# Altium PCB PCB1.PcbDoc
Units mm, origin at the board's own origin, x right, y up, seen from the top; angles counter-clockwise.
Board outline 50 x 57.78 mm, 2 copper layers (Top Layer, Bottom Layer); 37 components, 43 nets, 153 pads, 40 vias.
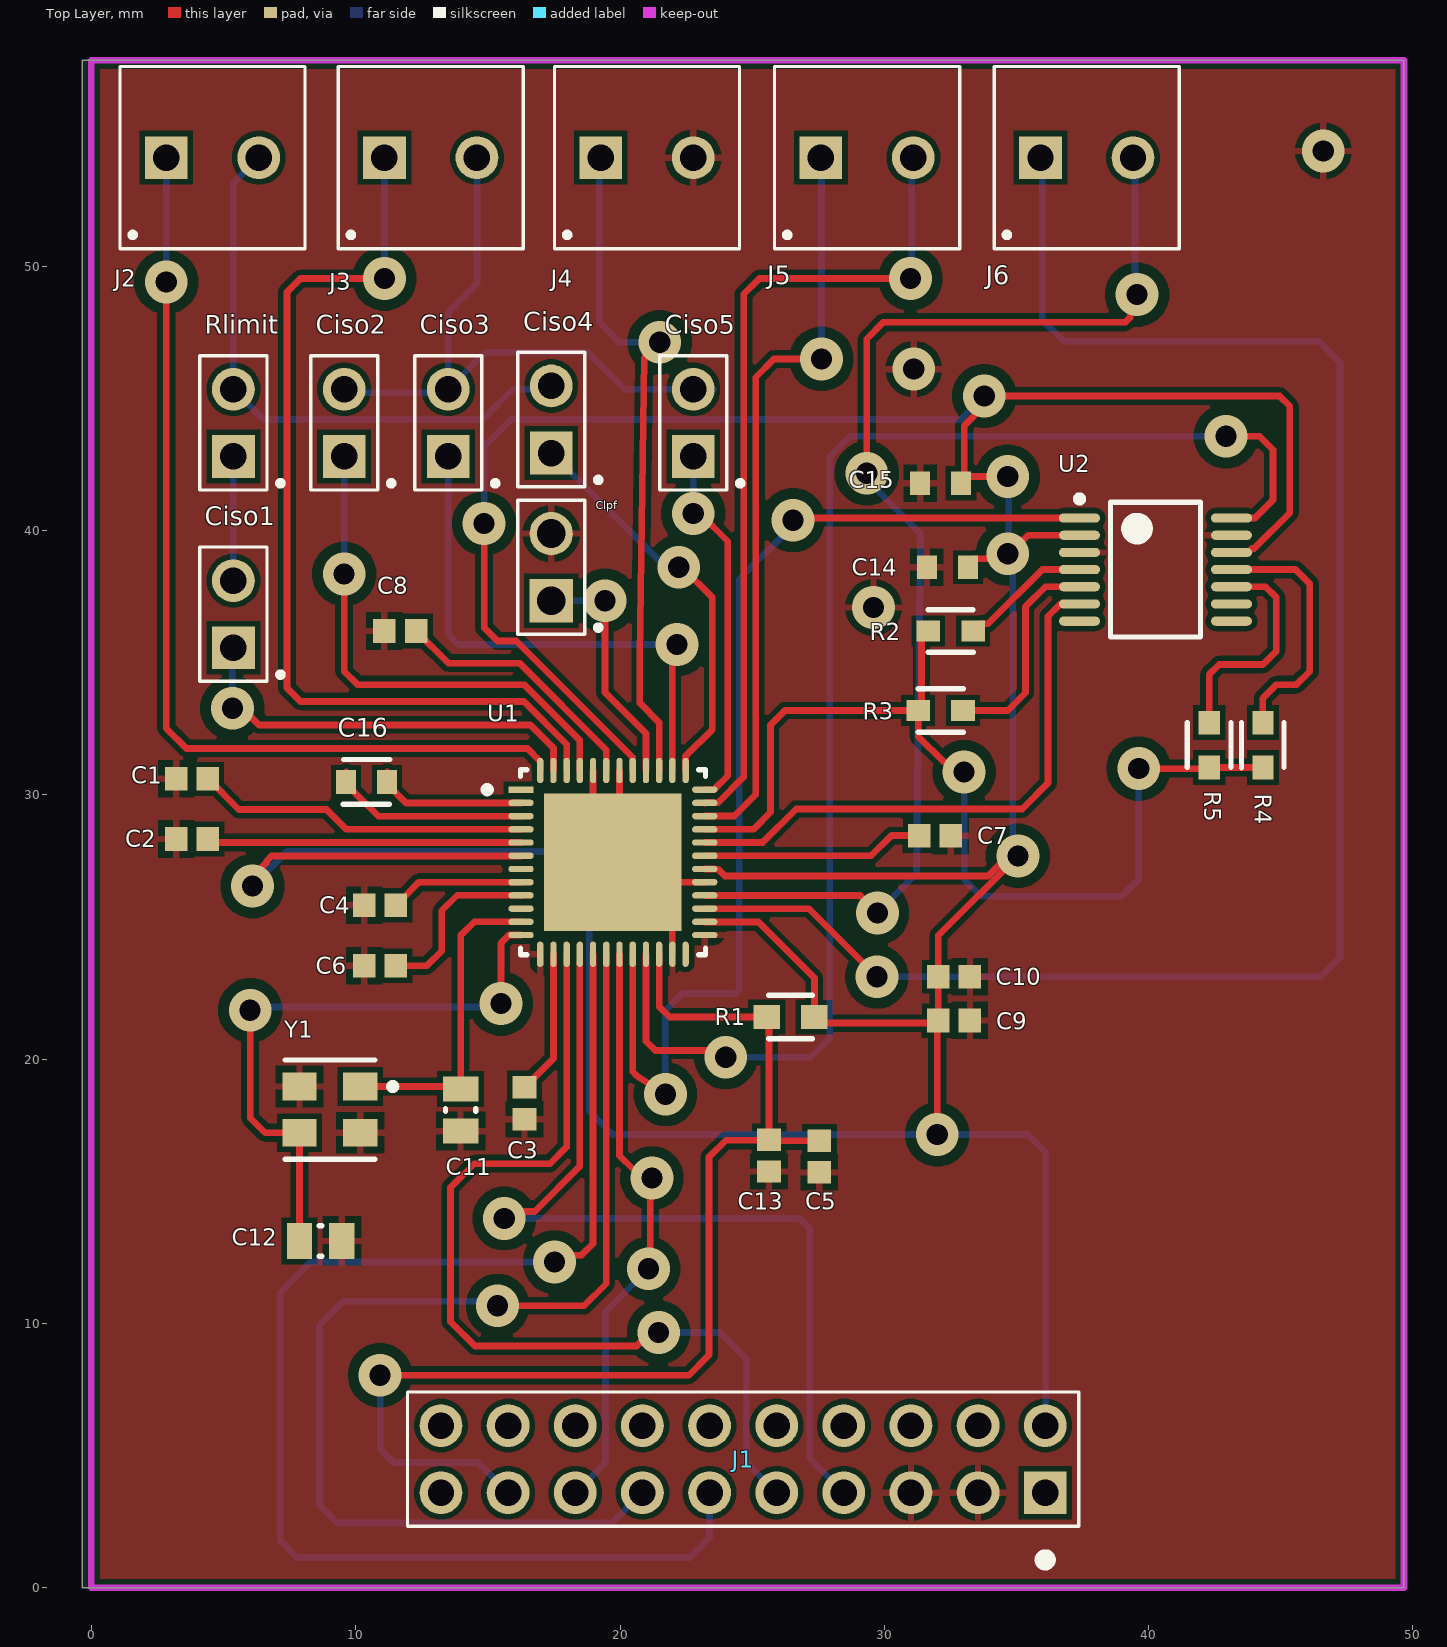
[diagram p0: Top Layer view]
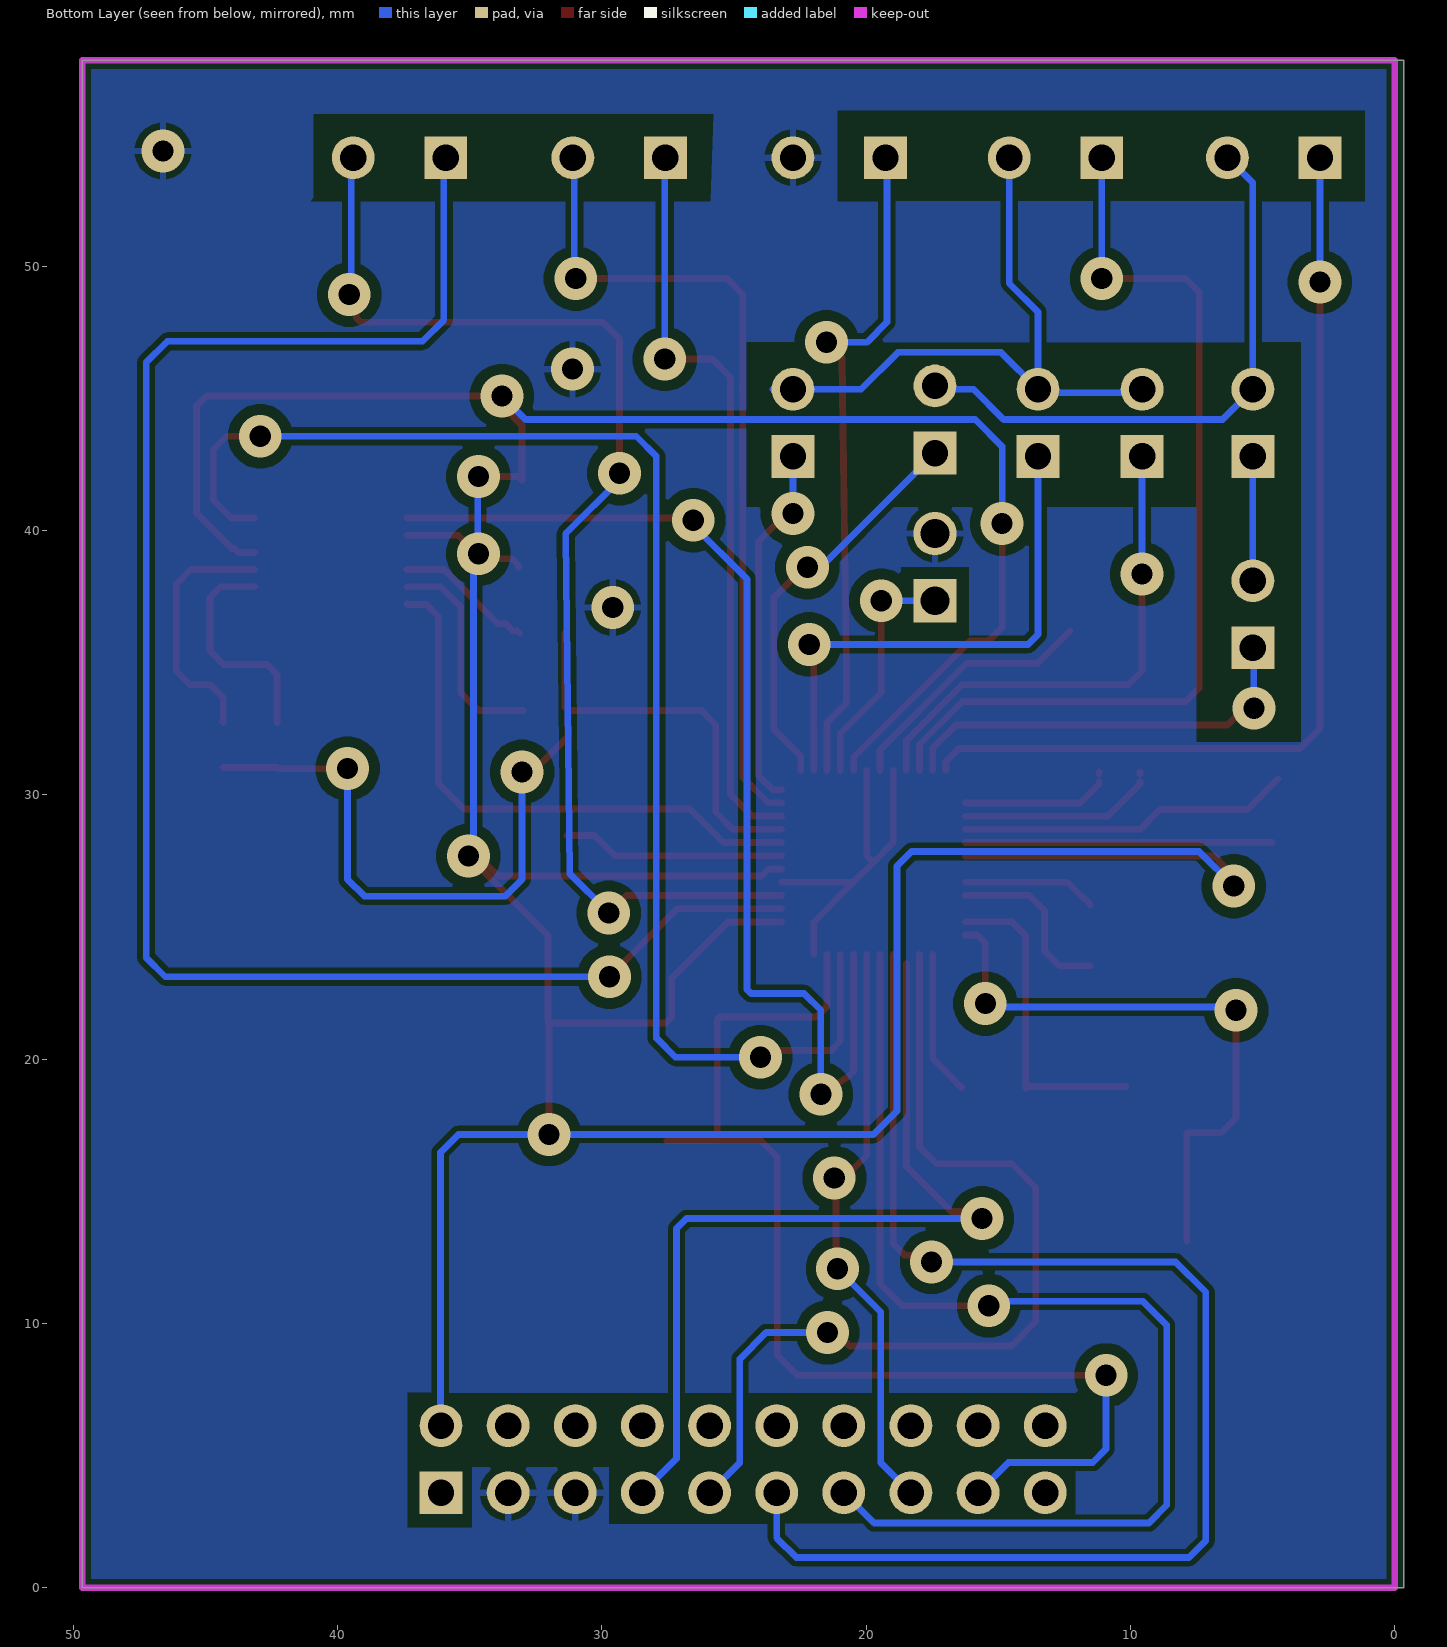
[diagram p1: Bottom Layer view, seen from below]
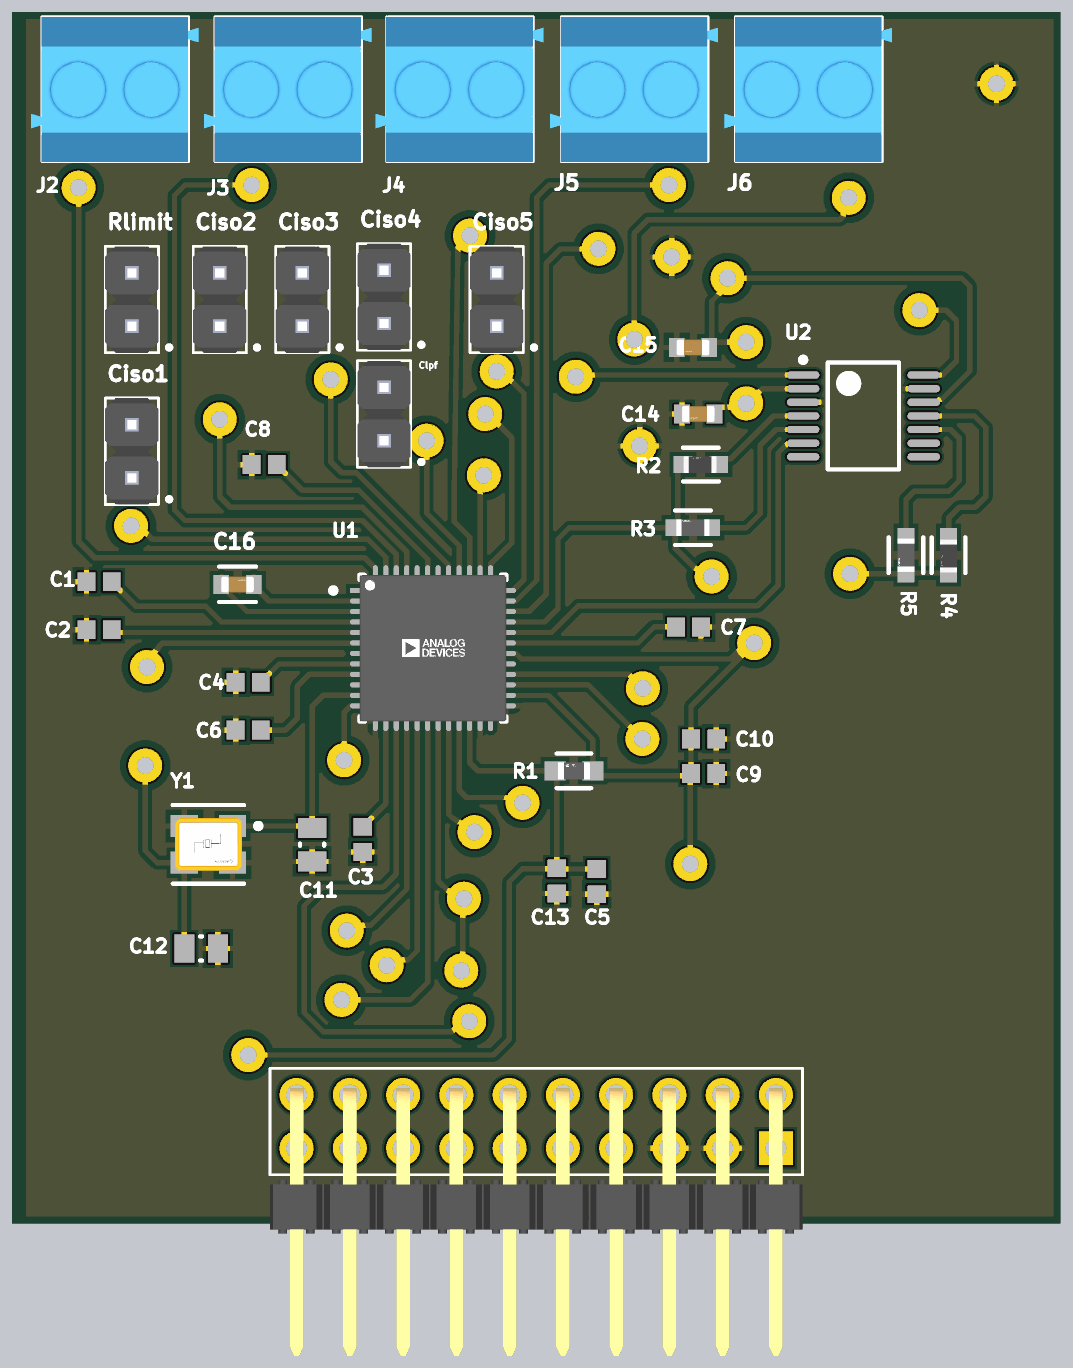
[diagram p2: 3D render of the assembled board from above, using the file's embedded part models]

## Layer stack, top to bottom
Top Solder: solder mask 0.0102, Solder Resist, Dk 3.5
Top Layer: signal copper 0.0356
Dielectric 1: dielectric 0.32, FR-4, Dk 4.8
Bottom Layer: signal copper 0.0356
Bottom Solder: solder mask 0.0102, Solder Resist, Dk 3.5

## Board outline
-0.342,0 -0.342,57.785 49.658,57.785 49.658,0

## Design rules (kind name [scope] priority, off if disabled: settings)
Clearance Clearance_1 [IsVia] p1: gap=0.4 ignorepadtopadclearanceinfootprint=FALSE
Clearance [All] p2: gap=0.2 ignorepadtopadclearanceinfootprint=FALSE
MinimumSolderMaskSliver [All] p1: minsoldermaskwidth=0
PolygonConnect [All] p1: connectstyle=Relief reliefconductorwidth=0.254 reliefentries=4 polygonreliefangle="90 Angle" airgapwidth=0.254
RoutingVias [All] p1: holewidth=0.711 width=1.27 viastyle="Through Hole" minholewidth=0.711 minwidth=1.27 maxholewidth=0.711 maxwidth=1.27
SilkToSolderMaskClearance [IsPad] p1: minsilkscreentomaskgap=0 clearancetoexposedcopper=TRUE
SolderMaskExpansion [All] p1: expansion=0.102 istentingtop=FALSE
Width [All] p1: maxlimit=0.254 minlimit=0.254 preferedwidth=0.254
28 further rules are at their usual default settings.

## Classes and differential pairs
component class Sheet4: C1 C2 C3 C4 C5 C6 C7 C8 C9 C10 C11 C12 C13 R1 Y1
component class Sheet3: C14 C15 R2 R3 R4 R5 U2
component class Sheet2: C16 Ciso1 Ciso2 Ciso3 Ciso4 Ciso5 Clpf J1 J2 J3 J4 J5 J6 Rlimit U1

## Components (designator, comment, footprint, x,y, rotation, side; value= is the part's Value field where it differs from the comment)
C1 "470nF" CAPC1608X95X40LL15T15 3.81,30.607 r0 top
C2 "470nF" CAPC1608X95X40LL15T15 3.81,28.321 r0 top
C3 "470nF" CAPC1608X95X40LL15T15 16.383,18.325 r90 top
C4 "100nF" CAPC1608X95X40LL15T15 10.922,25.818 r0 top
C5 "100nF" CAPC1608X95X40LL15T15 27.541,16.31 r90 top
C6 "100nF" CAPC1608X95X40LL15T15 10.922,23.532 r0 top
C7 "470nF" CAPC1608X95X40LL15T15 31.916,28.448 r180 top
C8 "4.7uF" CAPC1608X95X40LL15T15 11.684,36.195 r0 top
C9 "10uF" CAPC1608X95X40LL15T15 32.639,21.463 r180 top
C10 "100nF" CAPC1608X95X40LL15T15 32.639,23.114 r180 top
C11 "12pF" CAPC0805(2012)100_L 13.97,18.071 r270 top
C12 "12pF" CAPC0805(2012)100_L 8.674,13.118 r0 top
C13 "10uF" CAPC1608X95X40LL15T15 25.636,16.345 r90 top
C14 "100nF" FP-GRM18-0_15-MFG#1 32.385,38.608 r180 top value=10uF
C15 "10uF" FP-GRM18-0_15-MFG#2 32.131,41.783 r180 top
C16 "100nF" FP-GRM18-0_15-MFG#2 10.414,30.48 r0 top value=10uF
Ciso1 "M20-9990246" "Male Header Socket 2-position"#1 5.373,36.83 r270 top
Ciso2 "M20-9990246" "Male Header Socket 2-position"#1 9.564,44.069 r270 top
Ciso3 "M20-9990246" "Male Header Socket 2-position"#1 13.501,44.069 r270 top
Ciso4 "M20-9990246" "Male Header Socket 2-position"#1 17.399,44.196 r270 top
Ciso5 "M20-9990246" "Male Header Socket 2-position"#1 22.772,44.069 r270 top
Clpf "M20-9990246" "Male Header Socket 2-position"#2 17.399,38.608 r270 top
J1 "10129382-920002BLF" "Base Board Modular Connector (MALE)" 24.658,4.863 r0 top
J2 "" "Terminal Block 2-position" 2.833,54.102 r0 top
J3 "" "Terminal Block 2-position" 11.088,54.102 r0 top
J4 "" "Terminal Block 2-position" 19.272,54.102 r0 top
J5 "" "Terminal Block 2-position" 27.598,54.102 r0 top
J6 "" "Terminal Block 2-position" 35.909,54.102 r0 top
R1 "10KΩ" FP-CPF0603-MFG 26.455,21.59 r0 top
R2 "RT0603BRB07200RL" FP-RT0603-MFG 32.512,36.195 r180 top value=200Ω
R3 "AC0603FR-132KL" FP-AC0603-MFG 32.131,33.184 r180 top
R4 "RT0603BRB07200RL" FP-RT0603-MFG 44.323,31.877 r270 top value=200Ω
R5 "AC0603FR-132KL" FP-AC0603-MFG 42.291,31.877 r270 top
Rlimit "M20-9990246" "Male Header Socket 2-position"#1 5.373,44.069 r270 top
U1 "AD5941BCPZ" FP-CP-48-4-IPC_A 19.732,27.441 r0 top
U2 "ADG1604BRUZ" ADI-RU-14_N 40.259,38.518 r0 top
Y1 "ABM8-32.000MHZ-9-D1G-T" FP-ABM8-MFG 9.024,18.085 r180 top

## Footprints (in the part's own frame and the unit in brackets; to place one, negate y for a bottom-side part, rotate by r counter-clockwise, add the part's x,y. Pads: shape width x height; smd on the part's side, far side on the other; paste and mask are expansions set on the pad)
ADI-RU-14_N [mm] "SOP, 14-Leads, Body 5x4.4mm, Pitch 0.65mm, IPC Medium Density"
  oval 1.55x0.35 smd: 1(-2.875,1.95) 2(-2.875,1.3) 3(-2.875,0.65) 4(-2.875,0) 5(-2.875,-0.65) 6(-2.875,-1.3) 7(-2.875,-1.95) 8(2.875,-1.95) 9(2.875,-1.3) 10(2.875,-0.65) 11(2.875,0) 12(2.875,0.65) 13(2.875,1.3) 14(2.875,1.95)
  silkscreen extent -3,-2.55 1.7,2.8, body extent -2.25,-2.55 2.25,2.55, height 1.2
"Base Board Modular Connector (MALE)" [mm] "10129382-920002BLF"
  rect 1.62x1.62 hole 1 mask+0.102: 1(11.43,-1.27)
  round 1.62 hole 1 mask+0.102: 2(8.89,-1.27) 3(6.35,-1.27) 4(3.81,-1.27) 5(1.27,-1.27) 6(-1.27,-1.27) 7(-3.81,-1.27) 8(-6.35,-1.27) 9(-8.89,-1.27) 10(-11.43,-1.27) 11(11.43,1.27) 12(8.89,1.27) 13(6.35,1.27) 14(3.81,1.27) 15(1.27,1.27) 16(-1.27,1.27) 17(-3.81,1.27) 18(-6.35,1.27) 19(-8.89,1.27) 20(-11.43,1.27)
  silkscreen extent -12.7,-4.01 12.7,2.54, body extent -12.7,-11.17 12.7,1.59, height 4.83
CAPC0805(2012)100_L [mm] "Chip Capacitor, Body 2.0x1.2mm, Height 1.0mm, IPC High Density"
  rect 0.95x1.35 smd: 1(-0.8,0) 2(0.8,0)
  silkscreen extent -0.05,-0.58 0.05,0.58, body extent -1.1,-0.72 1.1,0.72, height 1
CAPC1608X95X40LL15T15 [mm] "Chip Capacitor, 2-Leads, Body 1.60x0.80mm, IPC High Density"
  rect 0.85x0.9 smd: 1(-0.6,0) 2(0.6,0)
  body extent -0.87,-0.48 0.88,0.48, height 0.95
FP-ABM8-MFG [mm]
  rect 1.3x1.05 smd paste+0 mask+0: 1(-1.15,-0.875) 2(1.15,-0.875) 3(1.15,0.875) 4(-1.15,0.875)
  silkscreen extent -2.5,-1.88 1.7,1.88, body extent -1.9,-1.5 1.9,1.5, height 0.25
FP-AC0603-MFG [mm]
  rect 0.9x0.8 smd paste+0 mask+0: 1(-0.85,0) 2(0.85,0)
  silkscreen extent -0.85,-0.82 0.85,0.82, body extent -1.4,-0.55 1.4,0.55, height 0.25
FP-CP-48-4-IPC_A [mm]
  rect 0.961x0.239 smd paste+0 mask+0: 1(-3.476,2.75)
  rrect100% 0.961x0.239 smd paste+0 mask+0: 2(-3.476,2.25) 3(-3.476,1.75) 4(-3.476,1.25) 5(-3.476,0.75) 6(-3.476,0.25) 7(-3.476,-0.25) 8(-3.476,-0.75) 9(-3.476,-1.25) 10(-3.476,-1.75) 11(-3.476,-2.25) 12(-3.476,-2.75) 25(3.476,-2.75) 26(3.476,-2.25) 27(3.476,-1.75) 28(3.476,-1.25) 29(3.476,-0.75) 30(3.476,-0.25) 31(3.476,0.25) 32(3.476,0.75) 33(3.476,1.25) 34(3.476,1.75) 35(3.476,2.25) 36(3.476,2.75)
  rrect100% 0.239x0.961 smd paste+0 mask+0: 13(-2.75,-3.476) 14(-2.25,-3.476) 15(-1.75,-3.476) 16(-1.25,-3.476) 17(-0.75,-3.476) 18(-0.25,-3.476) 19(0.25,-3.476) 20(0.75,-3.476) 21(1.25,-3.476) 22(1.75,-3.476) 23(2.25,-3.476) 24(2.75,-3.476) 37(2.75,3.476) 38(2.25,3.476) 39(1.75,3.476) 40(1.25,3.476) 41(0.75,3.476) 42(0.25,3.476) 43(-0.25,3.476) 44(-0.75,3.476) 45(-1.25,3.476) 46(-1.75,3.476) 47(-2.25,3.476) 48(-2.75,3.476)
  rect 5.2x5.2 smd paste-1000 mask+0: 49(0,0)
  silkscreen extent -4.88,-3.5 3.5,3.5, body extent -4.46,-4.46 4.46,4.46, height 0.25
FP-CPF0603-MFG [mm]
  rect 1x0.9 smd paste+0 mask+0: 1(-0.9,0) 2(0.9,0)
  silkscreen extent -0.82,-0.82 0.82,0.82, body extent -1.5,-0.55 1.5,0.55, height 0.25
FP-GRM18-0_15-MFG#1 [mm]
  rect 0.75x0.9 smd paste+0: 1(-0.775,0) 2(0.775,0)
  body extent -1.25,-0.58 1.25,0.58, height 0.25
FP-GRM18-0_15-MFG#2 [mm]
  rect 0.75x0.9 smd paste+0 mask+0: 1(-0.775,0) 2(0.775,0)
  body extent -1.25,-0.58 1.25,0.58, height 0.25
FP-RT0603-MFG [mm]
  rect 0.9x0.8 smd paste+0 mask+0: 1(-0.85,0) 2(0.85,0)
  silkscreen extent -0.85,-0.81 0.86,0.8, body extent -1.4,-0.55 1.4,0.55, height 0.25
"Male Header Socket 2-position"#1 [mm]
  rect 1.62x1.62 hole 1 mask+0.102: 1(1.27,0)
  round 1.62 hole 1 mask+0.102: 2(-1.27,0)
  silkscreen extent -2.54,-1.27 2.54,1.88, body extent -2.54,-1.27 2.54,1.27, height 8.74
"Male Header Socket 2-position"#2 [mm]
  rect 1.638x1.638 hole 1.092 mask+0.102: 1(1.27,0)
  round 1.638 hole 1.092 mask+0.102: 2(-1.27,0)
  silkscreen extent -2.54,-1.27 2.54,1.88, body extent -2.54,-1.27 2.54,1.27, height 8.74
"Terminal Block 2-position" [mm]
  rect 1.62x1.62 hole 1 mask+0.102: 1(0,0)
  round 1.62 hole 1 mask+0.102: 2(3.5,0)
  silkscreen extent -1.75,-3.45 5.25,3.45, body extent -2.28,-3.47 5.72,3.43, height 8.5

## Part data
C1 C2 C3 C4 C5 C6 C7 C8 C9 C10 C13: library part CMP-2006-01605-1, Manufacturer=Vitramon, Part Number=VJ0603G474KXQPW1BC
C11 C12: library part CMP-1036-00968-1, Case-EIA=0805, Case-Metric=2012, Rated Voltage="100 V", Tolerance=Â±10%, Max Thickness="1 mm", Technology=SMT
C14 C16: library part CMP-2000-05448-2, "CAP CER 10UF 10V X5R 0603", Capacitance=10uF, Manufacturer=Murata, Manufacturer Part Number=GRM188R61A106KE69D, Package=GRM18-0.15, Temperature="-55°C to +85°C", Temperature Characteristic=X5R, Temperature Coefficient=15%, Temperature Range High=+85°C, Temperature Range Low=-55°C, Tolerance=10%, Voltage Rating=10V, Automotive=No, Category=Cap, ComponentLink2Description=Datasheet, ComponentLink2URL=https://search.murata.co.jp/Ceramy/image/img/A01X/G101/ENG/GRM188R61A106KE69-01A.pdf, Device Class L1="Passive Components", Device Class L2=Capacitors, Device Class L3="Ceramic Capacitors", Digikey Description="CAP CER 10UF 10V X5R 0603", Height=0.95mm, Lead Free=Yes, Material=Ceramic, Mouser Description="Multilayer Ceramic Capacitors MLCC - SMD/SMT 0603 10uF 10volts X5R + - 10%", Octopart=https://octopart.com/grm188r61a106ke69d-murata-22851381, RoHS=TRUE
C15: library part CMP-2000-05448-2, Manufacturer=Murata, Manufacturer Part Number=GRM188R61A106KE69D, Package=GRM18-0.15, Temperature="-55°C to +85°C", Temperature Characteristic=X5R, Temperature Coefficient=15%, Temperature Range High=+85°C, Temperature Range Low=-55°C, Tolerance=10%, Voltage Rating=10V, Automotive=No, Capacitance=10uF, Category=Cap, ComponentLink2Description=Datasheet, ComponentLink2URL=https://search.murata.co.jp/Ceramy/image/img/A01X/G101/ENG/GRM188R61A106KE69-01A.pdf, Device Class L1="Passive Components", Device Class L2=Capacitors, Device Class L3="Ceramic Capacitors", Digikey Description="CAP CER 10UF 10V X5R 0603", Height=0.95mm, Lead Free=Yes, Material=Ceramic, Mouser Description="Multilayer Ceramic Capacitors MLCC - SMD/SMT 0603 10uF 10volts X5R + - 10%", Octopart=https://octopart.com/grm188r61a106ke69d-murata-22851381, RoHS=TRUE
Ciso1 Ciso2 Ciso3 Ciso4 Ciso5 Clpf Rlimit: library part "M20-9990246 (JUMPER)", "Headers & Wire Housings M20 2 Position SIL VERTICAL PTH HEADER TIN", Supplier Part Number 1=952-2262-ND, Supplier 1=DigiKey, Supplier 2=Mouser, Supplier 3=Farnell, Supplier Part Number 2=855-M20-9990246, Supplier Part Number 3=M20-9990246
J1: library part "Base Board Modular Connector (MALE)"
J2 J3 J4 J5 J6: library part TB0011-350-02BE, "Fixed Terminal Blocks 2 Poles, Screw Type, Horizontal, 3.50 Pitch, 24-18 (AWG), Blue, Terminal Block Connector", Supplier Part Number 1=2223-TB0011-350-02BE-ND, Supplier 1=DigiKey, Supplier 2=Mouser, Supplier 3=Farnell, Supplier Part Number 2=179-TB0011-350-02BE, Supplier Part Number 3=TB0011-350-02BE
R1: library part CMP-03211-003506-1, Manufacturer="TE Connectivity", Manufacturer Part Number=CPF0603D10KE, Package=CPF0603, Power Rating=0.063W, Temperature="-55°C to +155°C", Temperature Coefficient=25ppm/°C, Temperature Range High=+155°C, Temperature Range Low=-55°C, Tolerance=0.5%, Voltage Rating=50V, Automotive=No, Category=Res, ComponentLink2Description=Datasheet, ComponentLink2URL=https://www.te.com/commerce/DocumentDelivery/DDEController?Action=showdoc&DocId=Data+Sheet%7F1773200%7FM%7Fpdf%7FEnglish%7FENG_DS_1773200_M.pdf%7F3-1676481-2, Composition="Thin Film", Device Class L1="Passive Components", Device Class L2=Resistors, Device Class L3="Chip SMD Resistors", Height=0.55mm, Ipc Land Pattern Name=RESC15580X45, Lead Free=Yes, Octopart=https://octopart.com/cpf0603d10ke-te+connectivity-22737789, octopart_url=https://octopart.com/cpf0603d10ke-te+connectivity-22737789, packaging="5k Reel", Resistance=10KΩ, RoHS=TRUE, Series=CPF
R2 R4: library part CMP-03412-026497-1, "RES SMD 200 OHM 0.1% 1/10W 0603", Manufacturer=Yageo, Package=RT0603, Power Rating=0.1W, Resistance=200Ω, Temperature="-55°C to +155°C", Temperature Coefficient="10 ppm/°C", Temperature Range High=+155°C, Temperature Range Low=-55°C, Tolerance=0.001, Voltage Rating=75V, Automotive=No, Category=Res, ComponentLink2Description=Datasheet, ComponentLink2URL=http://www.yageo.com/documents/recent/PYu-RT_1-to-0.01_RoHS_L_9.pdf, Composition="Thin Film", Device Class L1="Passive Components", Device Class L2=Resistors, Device Class L3="Chip SMD Resistors", Digikey Description="RES SMD 200 OHM 0.1% 1/10W 0603", Footprint Url=http://www.yageo.com/exep/pages/download/literatures/PYu-R_Mount_10.pdf, Height=0.55mm, Ipc Land Pattern Name=RESC16080X45, Lead Free=Yes, Manufacturer Part Number=RT0603BRB07200RL, Mouser Description="Thin Film Resistors - SMD 1/10W 200 ohm .1% 10ppm", Octopart=https://octopart.com/rt0603brb07200rl-yageo-71393466, RoHS=TRUE, Series=RT
R3 R5: library part CMP-03412-038998-1, "RES 2kΩ 1.00% 0.1W 0603", RoHS Compliant=Yes
U1: library part CMP-09085-000021-2, "BIO-IMPEDANCE & ELECTROCHEMICAL", RoHS Compliant=Yes
U2: library part CMP-0793-00105-1, "1 Ohm Typical On Resistance, +/-5 V, +12 V, +5 V and +3.3 V, 4:1 Multiplexer, 0.95 Ohm Ron, 14-pin SOP (RU-14), Tube", Manufacturer="Analog Devices", Bandwidth (Hz)="15M, 19M, 16M, 15M", Code_JEDEC=MO-153AB-1, ComponentLink1Description="Manufacturer URL", ComponentLink1URL=http://www.analog.com/en/index.html, ComponentLink2Description=Datasheet, ComponentLink2URL=http://www.analog.com/static/imported-files/data_sheets/ADG1604.pdf, ComponentLink3Description="Package Specification", ComponentLink3URL=http://www.analog.com/static/imported-files/packages/36057385283879153717235186773RU14.pdf, DatasheetVersion="Rev. A", Max Analog Signal Range="Vss to Vdd", Mounting Technology="Surface Mount", PackageDescription="14-Pin Thin Shrink Small Outline Package, Body 5 x 4.4 mm, Pitch 0.65 mm", PackageReference=RU-14, PackageVersion=Aug-02, Packing=Tube, PartNumber=ADG1604BRUZ, Ron (ohms)=950m, t transition (s)=100n
Y1: library part CMP-27762-007061-1, "Crystal 32MHz ±10ppm 9pF SMD-4 3.2mm x 2.5mm"

## Via types
v1: diameter 1.62, hole 0.8, Top Layer to Bottom Layer, 40 vias

## Nets (pads, with @x,y where several pads share a name; then routed paths per layer and width w, separated by ;. In a path a pad name is that pad's centre, name@x,y a point inside that pad or via, vN(x,y) a via of type N, cw(c..) or ccw(c..) an arc to the next point about the centre after c; other vN are vias at no path point)
3V3: C9.2 C10.2 C14.1 C15.1 J1.11 R1.2 U1.6 U1.26 U1.30 U1.41 U2.2 U2.12 | length 175.8
  Top Layer w0.254: v1(6.096,26.543) 6.096,26.913 6.64,27.457 6.64,27.504 6.82,27.683 16.249,27.683 U1.6 ; v1(14.859,40.259) 14.859,36.322 15.367,35.814 16.076,35.814 20.474,31.416 20.474,30.924 U1.41 ; U1.26 23.214,25.183 25.236,25.183 27.355,23.064 R1.2 27.585,21.36 31.936,21.36 C9.2@32.004,21.428 ; U1.30@23.553,27.191 U1.30 23.214,27.183 23.707,27.183 23.966,26.924 33.92,26.924 34.682,27.686 v1(35.052,27.686) 32.039,24.673 C10.2 C9.2 C9.2@32.004,21.428 ; v1(32.004,17.145) C9.2@32.004,21.428 ; C15.1@33.026,41.904 C15.1@33.026,41.909 ; C14.1 33.16,38.683 33.408,38.931 34.486,38.931 v1(34.671,39.116) 34.741,39.116 35.443,39.818 U2.2 ; v1(34.671,42.037) 33.154,42.037 C15.1@33.026,41.909 ; U2.12 43.76,39.168 43.908,39.316 43.993,39.316 45.339,40.662 45.339,44.704 44.958,45.085 v1(33.782,45.085) 33.782,44.732 33.026,43.977 C15.1@33.026,41.909
  Bottom Layer w0.254: v1(6.096,26.543) 7.403,27.85 18.29,27.85 18.835,27.305 18.835,18.034 19.724,17.145 v1(32.004,17.145) 35.433,17.145 36.107,16.471 36.107,6.152 J1.11 ; v1@15.12,40.52 v1(14.859,40.259) 14.859,43.18 15.875,44.196 32.893,44.196 v1(33.782,45.085) ; v1(34.671,42.037) 34.703,42.005 34.703,40.455 34.703,39.148 v1(34.671,39.116) 34.861,38.925 34.861,27.876 v1(35.052,27.686)
GND: C1.1 C2.1 C3.1 C4.1 C5.1 C6.1 C7.1 C8.1 C9.1 C10.1 C11.2 C12.2 C13.1 C14.2 C15.2 Clpf.2 J1.2 J1.3 J4.2 U1.13 U1.23 U1.25 U1.29 U1.42 U1.44 U1.49 U2.3 U2.13 Y1.2 Y1.4 | length 14.5
  Top Layer w0.254: U1.44 18.982,28.191 U1.49 ; U1.42 19.982,27.691 U1.49 ; U1.23 21.982,25.191 U1.49@20.482,26.691 ; U1.29 U1.49@20.482,26.691 ; U1.49 U1.49@20.482,26.691
  other v1: 29.591,37.084 31.115,46.101 46.609,54.356
NetC1_2: C1.2 U1.4 | length 12.6
  Top Layer w0.254: C1.2 5.576,29.441 8.896,29.441 9.646,28.691 U1.4
NetC2_2: C2.2 U1.5 | length 11.6
  Top Layer w0.254: C2.2@4.636,28.191 U1.5
NetC3_2: C3.2 U1.14 | length 5.5
  Top Layer w0.254: C3.2 16.408,18.925 16.706,19.223 16.706,19.248 17.482,20.023 U1.14
NetC4_2: C4.2 U1.8 | length 5.1
  Top Layer w0.254: C4.2 11.522,25.843 11.82,26.141 11.845,26.141 12.395,26.691 U1.8
NetC5_2: C5.2 C13.2 J1.9 R1.1 U1.22 | length 43.9
  Top Layer w0.254: v1(10.922,8.038) 22.606,8.038 23.368,8.8 23.368,16.293 24.003,16.928 C13.2@25.636,16.928 ; U1.22 21.482,21.991 21.883,21.59 R1.1 25.636,21.508 C13.2 ; C13.2@25.671,16.91 C5.2
  Bottom Layer w0.254: v1(10.922,8.038) 10.925,8.035 10.925,5.243 11.429,4.739 14.622,4.739 J1.9
NetC6_2: C6.2 U1.9 | length 6.7
  Top Layer w0.254: C6.2 12.7,23.532 13.257,24.089 13.257,25.613 13.843,26.199 15.394,26.199 ; 15.394,26.198 16.249,26.198 U1.9
NetC7_2: C7.2 U1.31 | length 8.4
  Top Layer w0.254: U1.31 29.503,27.691 30.273,28.46 C7.2@31.332,28.46
NetC8_2: C8.2 U1.43 | length 9.8
  Top Layer w0.254: C8.2 13.501,34.978 16.196,34.978 19.482,31.692 U1.43
NetC11_1: C11.1 U1.11 Y1.1 | length 12.1
  Top Layer w0.254: Y1.1 13.881,18.96 C11.1 13.97,24.675 14.486,25.191 U1.11
NetC12_1: C12.1 U1.12 Y1.3 | length 23
  Top Layer w0.254: v1(6.008,21.844) 6.008,17.778 6.576,17.21 Y1.3 C12.1 ; v1(15.494,22.098) 15.494,24.384 15.801,24.691 U1.12
  Bottom Layer w0.254: v1(6.008,21.844) 6.135,21.971 15.367,21.971 v1(15.494,22.098)
NetC16_1: C16.1 U1.3 | length 7.3
  Top Layer w0.254: C16.1 9.639,30.405 10.853,29.191 U1.3 ; C16.1@9.639,30.786 C16.1@9.639,30.861
NetC16_2: C16.2 U1.2 | length 5.5
  Top Layer w0.254: C16.2 11.189,30.405 11.903,29.691 U1.2 ; C16.2@11.189,30.786 C16.2@11.189,30.861
NetCiso1_1: Ciso1.1 U1.47 | length 15.9
  Top Layer w0.254: v1(5.334,33.274) 5.704,33.274 6.339,32.639 16.609,32.639 17.482,31.766 U1.47
  Bottom Layer w0.254: v1(5.334,33.274) 5.334,35.521 Ciso1.1
NetCiso1_2: Ciso1.2 Rlimit.1 | length 4.4
  Bottom Layer w0.254: Ciso1.2 Rlimit.1@5.373,42.545
NetCiso2_1: Ciso2.1 U1.45 | length 19.1
  Top Layer w0.254: v1(9.564,38.354) 9.564,34.671 10.072,34.163 16.369,34.163 18.482,32.05 U1.45
  Bottom Layer w0.254: v1(9.564,38.354) Ciso2.1@9.564,42.672
NetCiso2_2: Ciso2.2 Ciso3.2 Ciso5.2 J3.2 | length 24.5
  Bottom Layer w0.254: Ciso2.2@9.564,45.212 13.501,45.212 Ciso3.2 ; J3.2 14.588,49.347 13.501,48.26 Ciso3.2 ; Ciso5.2@23.534,45.339 Ciso5.2 20.193,45.339 18.796,46.736 14.898,46.736 Ciso3.2
NetCiso3_1: Ciso3.1 U1.38 | length 20.4
  Top Layer w0.254: U1.38 21.982,31.27 21.982,35.51 v1(22.158,35.686)
  Bottom Layer w0.254: Ciso3.1 13.501,36.068 13.882,35.687 v1@22.157,35.687
NetCiso4_1: Ciso4.1 U1.37 | length 15.3
  Top Layer w0.254: v1(22.225,38.608) 22.352,38.608 23.495,37.465 23.495,32.473 22.482,31.46 U1.37
  Bottom Layer w0.254: Ciso4.1 21.583,38.742 22.091,38.742 v1(22.225,38.608)
NetCiso4_2: Ciso4.2 J2.2 Rlimit.2 | length 22.4
  Bottom Layer w0.254: J2.2 5.373,53.142 Rlimit.2 6.516,44.196 14.799,44.196 15.942,45.339 Ciso4.2@17.692,45.339
NetCiso5_1: Ciso5.1 U1.36 | length 13.9
  Top Layer w0.254: v1(22.772,40.64) 23.026,40.64 24.076,39.59 24.076,30.714 23.553,30.191 U1.36
  Bottom Layer w0.254: v1(22.772,40.64) Ciso5.1
NetClpf_1: Clpf.1 U1.40 | length 9
  Top Layer w0.254: v1(19.431,37.338) 19.431,33.871 20.982,32.32 U1.40
  Bottom Layer w0.254: Clpf.1@17.526,37.338 v1(19.431,37.338)
NetJ1_4: J1.4 U1.16 | length 33.6
  Top Layer w0.254: v1(15.621,13.97) 15.882,14.231 16.776,14.231 18.474,15.93 U1.16@18.474,23.612
  Bottom Layer w0.254: v1(15.621,13.97) 26.797,13.97 27.178,13.589 27.178,4.883 J1.4
NetJ1_5: J1.5 U1.15 | length 35.1
  Top Layer w0.254: U1.15 17.982,16.673 17.348,16.039 14.486,16.039 13.589,15.142 13.589,10.062 14.507,9.144 20.631,9.144 21.139,9.652 v1(21.463,9.652)
  Bottom Layer w0.254: v1(21.463,9.652) 23.788,9.652 24.782,8.658 24.782,4.739 J1.5
NetJ1_6: J1.6 U1.17 | length 51.5
  Top Layer w0.254: v1(17.526,12.319) 17.787,12.58 18.549,12.58 18.982,13.013 U1.17
  Bottom Layer w0.254: v1(17.526,12.319) 8.294,12.319 7.151,11.176 7.151,1.778 7.786,1.143 22.645,1.143 23.388,1.886 J1.6
NetJ1_7: J1.7 U1.18 | length 43.9
  Top Layer w0.254: v1(15.367,10.668) 18.649,10.668 19.482,11.5 U1.18
  Bottom Layer w0.254: v1(15.367,10.668) 15.203,10.832 9.525,10.832 8.633,9.94 8.633,3.118 9.304,2.447 19.702,2.447 J1.7
NetJ1_8: J1.8 U1.19 | length 22.3
  Top Layer w0.254: U1.19 19.982,16.34 20.207,16.115 20.219,16.115 20.839,15.494 v1(21.209,15.494) 21.145,15.43 21.145,12.128 v1(21.082,12.065)
  Bottom Layer w0.254: J1.8 19.454,4.739 19.454,10.437 v1(21.082,12.065)
NetJ2_1: J2.1 U1.48 | length 36.6
  Top Layer w0.254: v1(2.833,49.403) 2.833,32.512 3.595,31.75 16.494,31.75 16.982,31.262 U1.48
  Bottom Layer w0.254: v1(2.833,49.403) J2.1
NetJ3_1: J3.1 U1.46 | length 35.9
  Top Layer w0.254: v1(11.088,49.53) 7.913,49.53 7.405,49.022 7.405,34.036 7.913,33.528 16.362,33.528 17.982,31.908 U1.46
  Bottom Layer w0.254: v1(11.088,49.53) J3.1
NetJ4_1: J4.1 U1.39 | length 25.6
  Top Layer w0.254: U1.39 21.482,32.736 20.751,33.466 20.751,35.236 20.919,46.535 v1(21.502,47.117)
  Bottom Layer w0.254: J4.1 19.216,54.046 19.216,47.879 19.978,47.117 v1(21.502,47.117)
NetJ5_1: J5.1 U1.34 | length 28.5
  Top Layer w0.254: U1.34 23.214,29.198 24.321,29.198 25.134,30.011 25.134,45.796 25.82,46.482 27.617,46.482 v1(27.623,46.488)
  Bottom Layer w0.254: J5.1 27.623,54.077 v1(27.623,46.488)
NetJ5_2: J5.2 U1.35 | length 31.3
  Top Layer w0.254: U1.35 23.214,29.698 23.707,29.698 24.677,30.668 24.677,41.841 24.68,41.844 24.68,43.754 24.677,43.757 24.677,45.254 24.68,45.257 24.68,45.339 24.68,45.421 24.677,45.424 24.677,48.934 25.273,49.53 v1(30.988,49.53)
  Bottom Layer w0.254: v1(30.988,49.53) 31.043,49.585 31.043,54.047 J5.2
NetJ6_1: J6.1 U1.27 | length 66
  Top Layer w0.254: U1.27 27.141,25.691 v1(29.718,23.114)
  Bottom Layer w0.254: v1(29.718,23.114) 46.521,23.114 47.244,23.837 47.244,46.355 46.443,47.156 36.791,47.156 35.98,47.967 35.98,54.031 J6.1
NetJ6_2: J6.2 U1.28 | length 46.5
  Top Layer w0.254: U1.28 29.078,26.191 v1(29.742,25.527) ; v1(29.337,42.164) 29.337,47.244 29.971,47.878 39.129,47.878 39.3,48.048 39.3,48.659 v1@39.536,48.895
  Bottom Layer w0.254: v1(29.337,42.164) 29.337,41.91 31.296,39.951 31.371,39.876 31.371,39.77 31.221,27.019 29.742,25.54 v1(29.742,25.527) ; J6.2 39.485,54.026 39.485,48.996 v1(39.561,48.92)
NetR2_1: R2.1 U2.4 | length 5.1
  Top Layer w0.254: R2.1@33.108,36.105 R2.1@33.206,36.203 ; R2.1 33.635,36.468 33.928,36.468 35.978,38.518 U2.4
NetR2_2: R2.2 R3.2 R4.2 R5.2 U1.33 | length 38.2
  Top Layer w0.254: U1.33 25.047,28.691 25.693,29.337 25.693,32.639 26.238,33.184 R3.2 ; R2.2@31.408,36.105 31.408,33.311 R3.2 ; v1(33.02,30.861) 32.65,30.861 32.261,31.251 32.233,31.251 31.281,32.203 R3.2 ; v1(39.624,30.988) 42.252,30.988 R5.2 R4.2
  Bottom Layer w0.254: v1(33.02,30.861) 33.02,26.797 33.655,26.162 38.989,26.162 39.624,26.797 v1(39.624,30.988)
NetR3_1: R3.1 U2.5 | length 8.3
  Top Layer w0.254: R3.1 34.671,33.184 35.345,33.858 35.345,37.116 36.097,37.868 U2.5
NetR4_1: R4.1 U2.11 | length 9.7
  Top Layer w0.254: U2.11 45.556,38.518 46.101,37.973 46.101,34.671 45.593,34.163 44.831,34.163 44.323,33.655 R4.1 R4.1@44.362,32.766
NetR5_1: R5.1 U2.10 | length 8.6
  Top Layer w0.254: R5.1 42.291,34.544 42.672,34.925 44.323,34.925 44.831,35.433 44.831,37.465 44.428,37.868 U2.10 U2.10@43.149,37.883
NetU1_20: U1.20 U2.1 | length 41.7
  Top Layer w0.254: U1.20 20.482,19.52 20.63,19.372 v1(21.717,18.669) ; v1(26.543,40.386) 26.625,40.468 U2.1
  Bottom Layer w0.254: v1(21.717,18.669) 21.717,21.844 22.352,22.479 24.362,22.479 24.511,22.628 24.511,38.157 26.543,40.189 v1(26.543,40.386)
NetU1_21: U1.21 U2.14 | length 53.9
  Top Layer w0.254: U1.21 20.982,20.674 21.336,20.32 23.749,20.32 v1(24.003,20.066) ; v1(42.926,43.561) 44.196,43.561 44.704,43.053 44.704,41.148 44.024,40.468 U2.14
  Bottom Layer w0.254: v1(24.003,20.066) 27.217,20.066 27.94,20.789 27.94,42.799 28.702,43.561 v1(42.926,43.561)
NetU1_32: U1.32 U2.6 | length 21.6
  Top Layer w0.254: U1.32 25.397,28.191 26.67,29.464 35.218,29.464 36.195,30.441 36.195,36.752 36.643,37.199 37.366,37.199 U2.6
pads on no net: J1.1 J1.10 J1.12 J1.13 J1.14 J1.15 J1.16 J1.17 J1.18 J1.19 J1.20 U1.1 U1.7 U1.10 U1.24 U2.7 U2.8 U2.9

## Polygon pours and split planes (outlines as drawn)
GND on Bottom Layer "GND_L02_P001" (solid, pour order 1): 0,57.785 50,57.785 50,0 0,0
GND on Top Layer "GND_L01_P000" (solid, pour order 0): 0,57.785 50,57.785 50,0 0,0

## Keep-outs
Keep-Out Layer:
  lines w0.254: 0,0 49.658,0 49.658,57.785 0,57.785 0,0

## Other copper
Bottom Layer:
  pour cut-out: 16.129,38.608 18.669,38.608 18.669,36.068 18.542,35.941 16.129,35.941
  pour cut-out: 3.556,40.894 7.493,40.894 7.493,32.004 3.556,32.004
  pour cut-out: 34.925,4.826 35.052,4.699 37.338,4.699 37.338,2.286 34.925,2.286
  pour cut-out: 12.065,4.572 29.718,4.572 29.718,2.413 12.192,2.413 12.065,2.286
  pour cut-out: 12.065,7.366 37.338,7.366 37.338,4.953 36.957,4.572 12.065,4.572
  pour cut-out: 12.065,7.366 37.338,7.366 37.338,4.699 12.065,4.699 12.065,4.445
  pour cut-out: 3.556,47.117 24.511,47.117 24.511,40.894 3.556,40.894
  pour cut-out: 25.781,55.753 40.894,55.753 40.894,52.578 41.021,52.451 25.908,52.451
  pour cut-out: 1.143,55.88 21.082,55.88 21.082,52.451 1.143,52.451

## Text inside footprints (layer, text, board x,y; h text height)
J1: Top Component Center "PWM / GPIO" at 16.38,8.061 h1 r90; Top Component Center "SPI" at 25.35,-7.814 h1; Top Component Center "I2C" at 20.612,21.777 h1; Top Component Center "POWER" at 37.889,7.126 h1 r270; Top Component Center "I2C_SCL" at 29.04,8.061 h1 r90; Top Component Center "SPI_CLK" at 27.895,1.665 h1 r270; Top Component Center "SPI_MISO" at 20.275,1.665 h1 r270; Top Component Center "+5V" at 35.349,1.665 h1 r270; Top Component Center "GND" at 30.269,1.665 h1 r270; Top Component Center "SPI_CS" at 25.355,1.665 h1 r270; Top Component Center "SPI_MOSI/SDIO" at 22.815,1.665 h1 r270; Top Component Center "GND" at 32.809,1.665 h1 r270; Top Component Center "I2C_ALRT" at 21.42,8.061 h1 r90; Top Component Center "I2C_ADDR" at 23.96,8.061 h1 r90; Top Component Center "I2C_SDA" at 26.5,8.061 h1 r90; Top Component Center "+3V3" at 36.827,8.061 h1 r90; Top Component Center "+2V5" at 34.287,8.061 h1 r90; Top Component Center "-2V5" at 31.747,8.061 h1 r90; Top Component Center "PWM / GPIO" at 17.823,1.665 h1 r270; Top Component Center "PWM / GPIO" at 15.283,1.665 h1 r270; Top Component Center "PWM / GPIO" at 12.743,1.665 h1 r270; Top Component Center "PWM / GPIO" at 18.92,8.061 h1 r90; Top Component Center "PWM / GPIO" at 13.84,8.061 h1 r90